# EAGLE board TRV_WIZ (EAGLE 6.4)
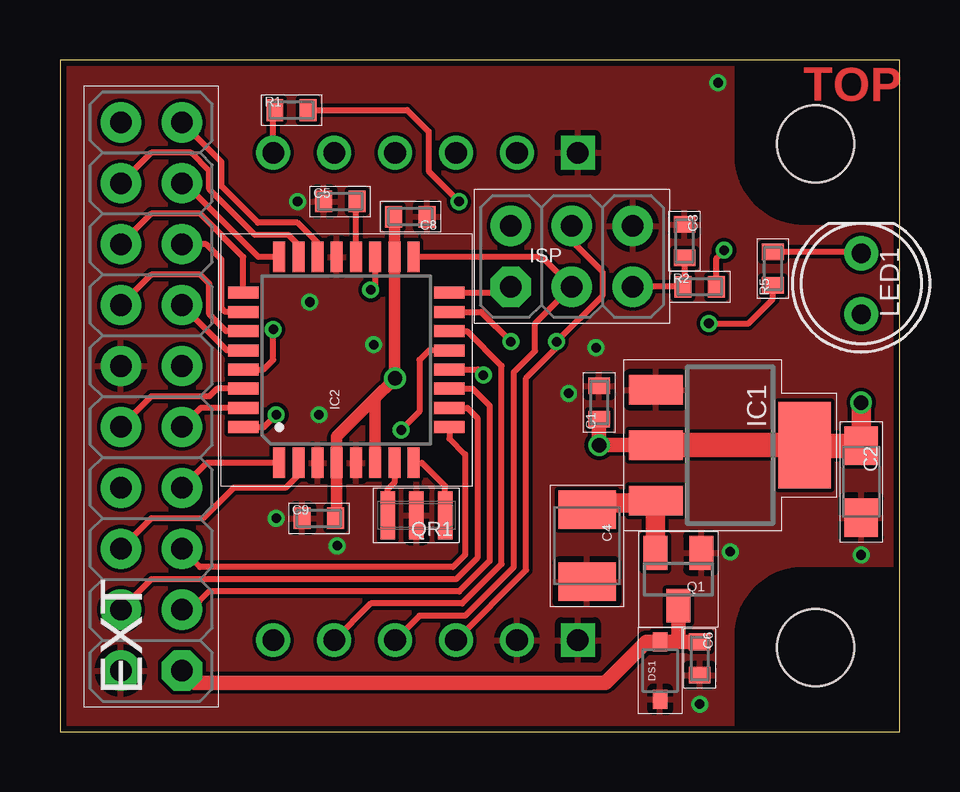
[diagram p0: board, top side]
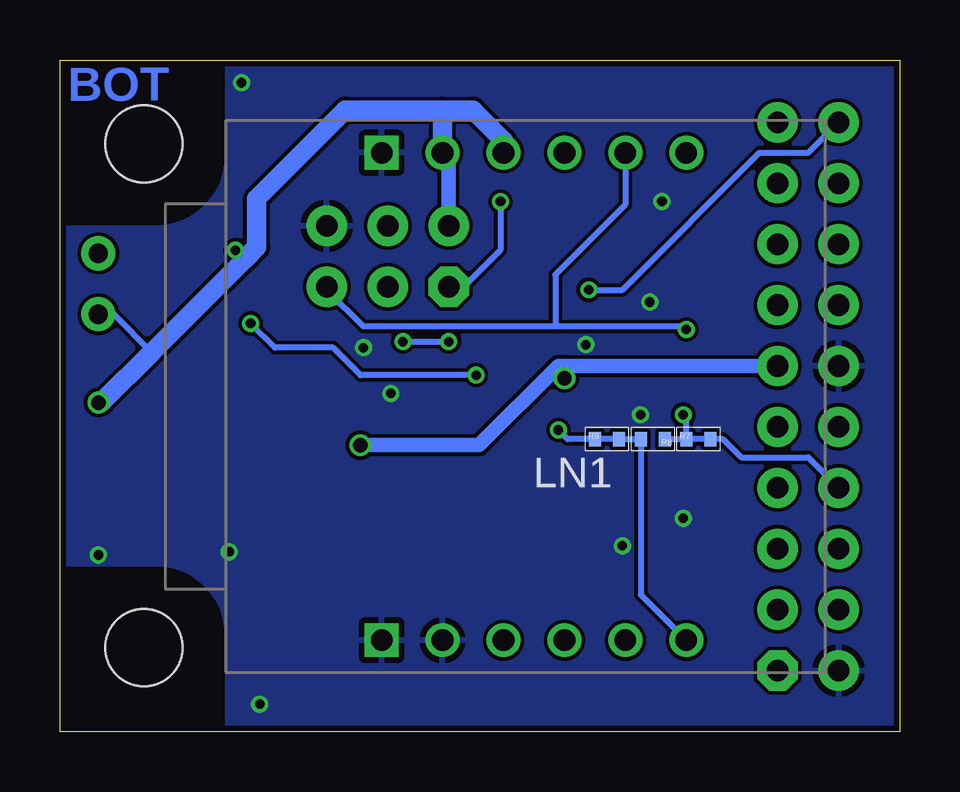
[diagram p1: board, bottom side, seen from below]

Size 35 x 28 mm. Coordinates in mm from the lower left corner, seen from the top.
Outline: 0,0 35,0 35,28 0,28 0,0
Copper layers (1*16): Top 0.035mm / dielectric 1.5mm / Bottom 0.035mm
Design rules "ITEADstudio_DRC *": minimum track width 6mil, minimum drill 12mil, track to track 6mil, track to pad 6mil, pad to pad 6mil, via to via 6mil, smd to smd 0mil, copper to edge 10mil, drill to drill 10mil, minimum pad ring 10mil, minimum via ring 6mil, stop-mask expansion 2mil, vias tented up to drill 100mil, thermal gap 10mil
Holes 3.2 mm at 31.5,24.5 31.5,3.5

## Footprints (pad centres in the part's own frame; a part is rotated, then mirrored left to right if it is on the bottom)
0603 = smd 0.7 x 0.9: 1 -0.697,0; 2 0.697,0
SMC_A = smd 1.6 x 1.4: + -1.5,0; - 1.5,0
SMC_B = smd 1.6 x 2.4: + -1.5,0; - 1.5,0
SOD323 = smd 0.8 x 0.6: A 1.2,0; C -1.2,0
ML20S = drill 0.9 pad 1.676 octagon: 1 -11.43,-1.27 | drill 0.9 pad 1.676: 2 -11.43,1.27; 3 -8.89,-1.27; 4 -8.89,1.27; 5 -6.35,-1.27; 6 -6.35,1.27; 7 -3.81,-1.27; 8 -3.81,1.27; 9 -1.27,-1.27; 10 -1.27,1.27; 11 1.27,-1.27; 12 1.27,1.27; 13 3.81,-1.27; 14 3.81,1.27; 15 6.35,-1.27; 16 6.35,1.27; 17 8.89,-1.27; 18 8.89,1.27; 19 11.43,-1.27; 20 11.43,1.27
SOT223 = smd 1.219 x 2.235: 1 -2.311,-3.099; 2 0,-3.099; 3 2.311,-3.099 | smd 3.6 x 2.2: 4 0,3.099
TQFP32-08 = smd 1.27 x 0.5: 1 -4.293,2.8; 2 -4.293,2; 3 -4.293,1.2; 4 -4.293,0.4; 5 -4.293,-0.4; 6 -4.293,-1.2; 7 -4.293,-2; 8 -4.293,-2.8; 17 4.293,-2.8; 18 4.293,-2; 19 4.293,-1.2; 20 4.293,-0.4; 21 4.293,0.4; 22 4.293,1.2; 23 4.293,2; 24 4.293,2.8 | smd 0.5 x 1.27: 9 -2.8,-4.293; 10 -2,-4.293; 11 -1.2,-4.293; 12 -0.4,-4.293; 13 0.4,-4.293; 14 1.2,-4.293; 15 2,-4.293; 16 2.8,-4.293; 25 2.8,4.293; 26 2,4.293; 27 1.2,4.293; 28 0.4,4.293; 29 -0.4,4.293; 30 -1.2,4.293; 31 -2,4.293; 32 -2.8,4.293
ML6S = drill 0.9 pad 1.676 octagon: 1 -2.54,-1.27 | drill 0.9 pad 1.676: 2 -2.54,1.27; 3 0,-1.27; 4 0,1.27; 5 2.54,-1.27; 6 2.54,1.27
T1-3/4 = drill 0.8 pad 1.422: A 1.27,0; C -1.27,0
WIZ820IO = drill 0.9 square: J1.1 -10.16,18.5; J2.1 10.16,18.5 | drill 0.9: J1.2 -10.16,15.96; J1.3 -10.16,13.42; J1.4 -10.16,10.88; J1.5 -10.16,8.34; J1.6 -10.16,5.8; J2.2 10.16,15.96; J2.3 10.16,13.42; J2.4 10.16,10.88; J2.5 10.16,8.34; J2.6 10.16,5.8
SOT23 = smd 1 x 1.4: 1 -0.95,-1.1; 2 0.95,-1.1; 3 0,1.1
CSTCE = smd 0.6 x 2: A -1.2,0; B 1.2,0; G 0,0
0402 = smd 0.5 x 0.6: 1 -0.5,0; 2 0.5,0

## Placement (x,y rotation side)
C1  1u  [0603]  22.48,13.72 90 top
C2  10u 6V  [SMC_A]  33.4,10.41 270 top
C3  100n  [0603]  26.04,20.45 270 top
C4  10u 20V  [SMC_B]  21.97,7.75 270 top
C5  100n  [0603]  11.68,22.1 0 top
C6  100n  [0603]  26.67,3.05 270 top
C8  100n  [0603]  14.61,21.46 180 top
C9  100n  [0603]  10.79,8.89 0 top
DS1  PESD12VL1BA  [SOD323]  25.02,2.54 90 top
EXT  EXT  [ML20S]  3.81,13.97 90 top
IC1  LD1117S33TR  [SOT223]  27.94,11.94 270 top
IC2  MEGA328P-AU  [TQFP32-08]  11.94,15.49 90 top
ISP  ISP  [ML6S]  21.34,19.81 0 top
LED1  LEDR  [T1-3/4]  33.4,18.67 270 top
LN1  WIZ820IO  [WIZ820IO]  3.09,13.97 90 bottom
Q1  IRLML9301TRPBF  [SOT23]  25.78,6.35 180 top
QR1  8M  [CSTCE]  14.86,9.02 180 top
R1  330R  [0603]  9.65,25.91 0 top
R2  10k  [0603]  26.67,18.54 0 top
R5  330R  [0603]  29.72,19.3 90 top
R7  cfg  [0402]  8.38,12.19 0 bottom
R8  cfg  [0402]  10.29,12.19 180 bottom
R9  cfg  [0402]  12.19,12.19 0 bottom

## Library data of the parts
C1-C6 C8 C9 R1 R2 R5 R7-R9 = RCL
DS1 = Diode
EXT ISP = Conn
IC1 = DCDC
IC2 = atmel
LED1 = Optic
LN1 = Other
Q1 = Transistor
QR1 = QUARTZ

## Nets
+3V3: C1.1 C2.+ C8.2 C9.2 EXT.11 IC1.2 IC1.4 IC2.4 IC2.6 IC2.18 ISP.2 LED1.A LN1.J2.2 LN1.J2.3 R2.2
GND: C1.2 C2.- C3.1 C4.- C5.1 C6.2 C8.1 C9.1 DS1.C EXT.2 EXT.12 IC1.1 IC2.3 IC2.5 IC2.21 ISP.6 LN1.J1.1 LN1.J1.2 LN1.J2.1 Q1.1 QR1.G
MISO: IC2.16 ISP.1 R1.2
MOSI: IC2.15 ISP.4 LN1.J1.3
N$1: LN1.J2.6 R1.1
N$2: C6.1 DS1.A EXT.1 Q1.3
N$3: EXT.19 IC2.22
N$4: C4.+ IC1.3 Q1.2
N$6: C5.2 IC2.20
N$7: IC2.8 QR1.A
N$8: IC2.7 QR1.B
N$10: IC2.12 R5.1
N$11: EXT.8 IC2.32 R7.1 R7.2 R8.1
N$15: EXT.20 IC2.19
N$21: LED1.C R5.2
PC0: EXT.18 IC2.23
PC1: EXT.17 IC2.24
PC2: EXT.16 IC2.25
PC3: EXT.15 IC2.26
PC4: EXT.14 IC2.27
PC5: EXT.13 IC2.28
PD3: EXT.7 IC2.1
PD4: EXT.6 IC2.2
PD5: EXT.5 IC2.9
PD6: EXT.4 IC2.10
PD7: EXT.3 IC2.11
RST: C3.2 IC2.29 ISP.5 LN1.J2.5 R2.1
RXD: EXT.10 IC2.30
SCK: IC2.17 ISP.3 LN1.J1.4
TXD: EXT.9 IC2.31
WIRQ: IC2.13 LN1.J1.6 R8.2 R9.1 R9.2
WSEL: IC2.14 LN1.J1.5

## Tracks (layer width: path | path; a pad name or v marks a point on that pad's centre or on a via)
+3V3  (via drill 0.4, 0.6)
  Top 0.254: R2.2 27.37,19.75 v27.69,20.07
  Top 0.406: 11.54,8.94 C9.2 | v13.97,14.73 13.94,14.73
  Top 0.483: C8.2 13.94,21.43 IC2.18 13.94,14.73 13.94,14.7 13.08,13.84 | 13.08,13.84 11.54,12.3 IC2.4 11.54,8.94 | IC2.6 13.14,13.79 13.08,13.84
  Top 0.61: IC1.2 v22.48,11.94 C1.1
  Top 0.813: 31.06,11.91 IC1.4 | C2.+ v33.4,13.72
  Top 1.016: C2.+ 31.06,11.91 | IC1.2 IC1.4
  Bottom 0.254: LED1.A 32.77,17.4 31.18,15.81 | v27.69,20.07 27.3,19.68
  Bottom 0.61: v22.48,11.94 17.53,11.94 14.22,15.24 13.97,15.24 | 13.97,15.24 EXT.11 | v13.97,14.73 13.97,15.24 | ISP.2 18.8,23.88 LN1.J2.2
  Bottom 0.813: v33.4,13.72 33.27,13.72 31.18,15.81 27.3,19.68 26.8,20.19 26.8,22.23 23.11,25.91 19.05,25.91 | 19.05,25.91 17.78,25.91 16.51,24.64 LN1.J2.3 | LN1.J2.2 19.05,25.91
GND  (via drill 0.4)
  other vias: 9.02,8.89 11.56,7.75 26.67,1.14 27.94,7.49 33.4,7.37 22.35,16 21.21,14.1 9.91,22.1 10.41,17.91 10.79,13.21 13.08,16.13 27.43,27.05
  pour Top: 0,0 28,0 28,4 arc-90 31,7 35,7 35,21 31,21 arc-90 28,24 28,28 0,28
  pour Bottom: 0,0 28,0 28,4 arc-90 31,7 35,7 35,21 31,21 arc-90 28,24 28,28 0,28
MISO  (via drill 0.4)
  Top 0.254: IC2.16 18.55,18.29 ISP.1 | R1.2 14.48,25.91 15.37,25.02 15.37,23.37 v16.64,22.1
  Bottom 0.254: v16.64,22.1 16.64,20.07 18.16,18.54 ISP.1
MOSI  (via drill 0.4)
  Top 0.254: IC2.15 17.56,17.49 v18.8,16.26 | ISP.4 21.34,20.45 22.61,19.18 22.61,18.16 v20.7,16.26 20.7,16 19.43,14.73 19.43,6.73 LN1.J1.3
  Bottom 0.254: v20.7,16.26 v18.8,16.26
N$1
  Top 0.254: LN1.J2.6 8.89,25.84 R1.1
N$2
  Top 0.61: EXT.1 5.59,2.03 22.73,2.03 24.44,3.74 DS1.A 25.78,3.74 | 25.78,3.74 C6.1 | Q1.3 25.78,3.74
N$3
  Top 0.254: IC2.22 10.74,20.38 9.91,21.21 8.26,21.21 6.73,22.73 6.73,23.75 EXT.19
N$4
  Top 0.61: 24.74,9.53 IC1.3
  Top 0.813: 24.74,9.53 22.25,9.53 C4.+ | Q1.2 24.83,9.62 IC1.3
N$6
  Top 0.254: IC2.20 12.34,22.05 C5.2
N$7
  Top 0.254: QR1.A 16.06,10.23 15.09,11.2 IC2.8
N$8
  Top 0.254: QR1.B 13.66,10.1 13.94,10.38 IC2.7
N$10  (via drill 0.4)
  Top 0.254: IC2.12 17.42,15.09 v17.65,14.86 | v27.05,17.02 28.7,17.02 29.72,18.03 R5.1
  Bottom 0.254: v17.65,14.86 22.48,14.86 23.62,16 26.04,16 v27.05,17.02
N$11  (via drill 0.4)
  Top 0.254: v9.02,13.21 8.5,12.69 IC2.32
  Bottom 0.254: EXT.8 3.81,11.43 6.6,11.43 7.37,12.19 R7.2 R7.1 | R7.1 8.88,13.07 v9.02,13.21 | R8.1 R7.1
N$15  (via drill 0.4)
  Top 0.254: IC2.19 13.14,18.6 v12.95,18.41
  Bottom 0.254: v12.95,18.41 11.56,18.41 5.84,24.13 3.81,24.13 EXT.20
N$21
  Top 0.254: R5.2 33.34,20 LED1.C
PC0
  Top 0.254: IC2.23 9.94,20.29 9.53,20.7 8.13,20.7 6.22,22.61 6.22,23.37 5.46,24.13 3.81,24.13 EXT.18
PC1
  Top 0.254: IC2.24 8.28,19.79 5.21,22.86 EXT.17
PC2
  Top 0.254: IC2.25 7.64,19.79 5.84,21.59 3.81,21.59 EXT.16
PC3
  Top 0.254: EXT.15 6.1,20.32 6.73,19.68 6.73,17.65 6.89,17.49 IC2.26
PC4
  Top 0.254: EXT.14 3.81,19.05 5.84,19.05 6.22,18.67 6.22,17.4 6.93,16.69 IC2.27
PC5
  Top 0.254: IC2.28 6.97,15.89 EXT.13
PD3
  Top 0.254: IC2.1 6.12,11.2 EXT.7
PD4
  Top 0.254: IC2.2 9.94,10.7 9.4,10.16 7.24,10.16 5.97,8.89 3.81,8.89 EXT.6
PD5
  Top 0.254: EXT.5 5.84,6.86 16.38,6.86 16.89,7.37 16.89,11.56 16.23,12.22 IC2.9
PD6
  Top 0.254: EXT.4 3.81,6.35 16.51,6.35 17.4,7.24 17.4,13.08 16.99,13.49 IC2.10
PD7
  Top 0.254: IC2.11 17.2,14.29 17.91,13.59 17.91,7.11 16.64,5.84 6.22,5.84 5.46,5.08 EXT.3
RST  (via drill 0.4)
  Top 0.254: IC2.29 8.49,15.09 8.89,15.49 v8.89,16.76 | R2.1 25.91,18.54 | 25.91,18.54 ISP.5 | C3.2 26.04,18.67 25.91,18.54
  Bottom 0.254: v8.89,16.76 9.02,16.89 14.35,16.89 | 14.35,16.89 22.35,16.89 23.88,18.41 ISP.5 | 14.35,16.89 14.35,19.05 11.43,21.97 LN1.J2.5
RXD
  Top 0.254: IC2.30 6.55,14.29 6.22,13.97 3.81,13.97 EXT.10
SCK
  Top 0.254: IC2.17 14.76,19.81 20.07,19.81 ISP.3 19.81,17.02 19.81,15.88 18.92,14.99 18.92,6.86 16.89,4.83 14.99,4.83 LN1.J1.4
TXD
  Top 0.254: IC2.31 5.87,13.49 EXT.9
WIRQ  (via drill 0.4)
  Top 0.254: IC2.13 15.39,15.89 14.99,15.49 14.99,13.34 v14.22,12.57
  Bottom 0.254: v14.22,12.57 13.84,12.19 R9.1 R9.2 R8.2 10.79,5.71 LN1.J1.6
WSEL
  Top 0.254: IC2.14 16.96,16.69 18.41,15.24 18.41,6.99 16.76,5.33 12.95,5.33 LN1.J1.5

## Text on the board
Top: TOP
Bottom: BOT